# Altium PCB PCB_PowerMonitor.PcbDoc
Units mil, origin at the board's own origin, x right, y up, seen from the top; angles counter-clockwise.
Board outline 1565 x 1440 mil, 2 copper layers (Top Layer, Bottom Layer); 9 components, 9 nets, 32 pads, 1 vias.
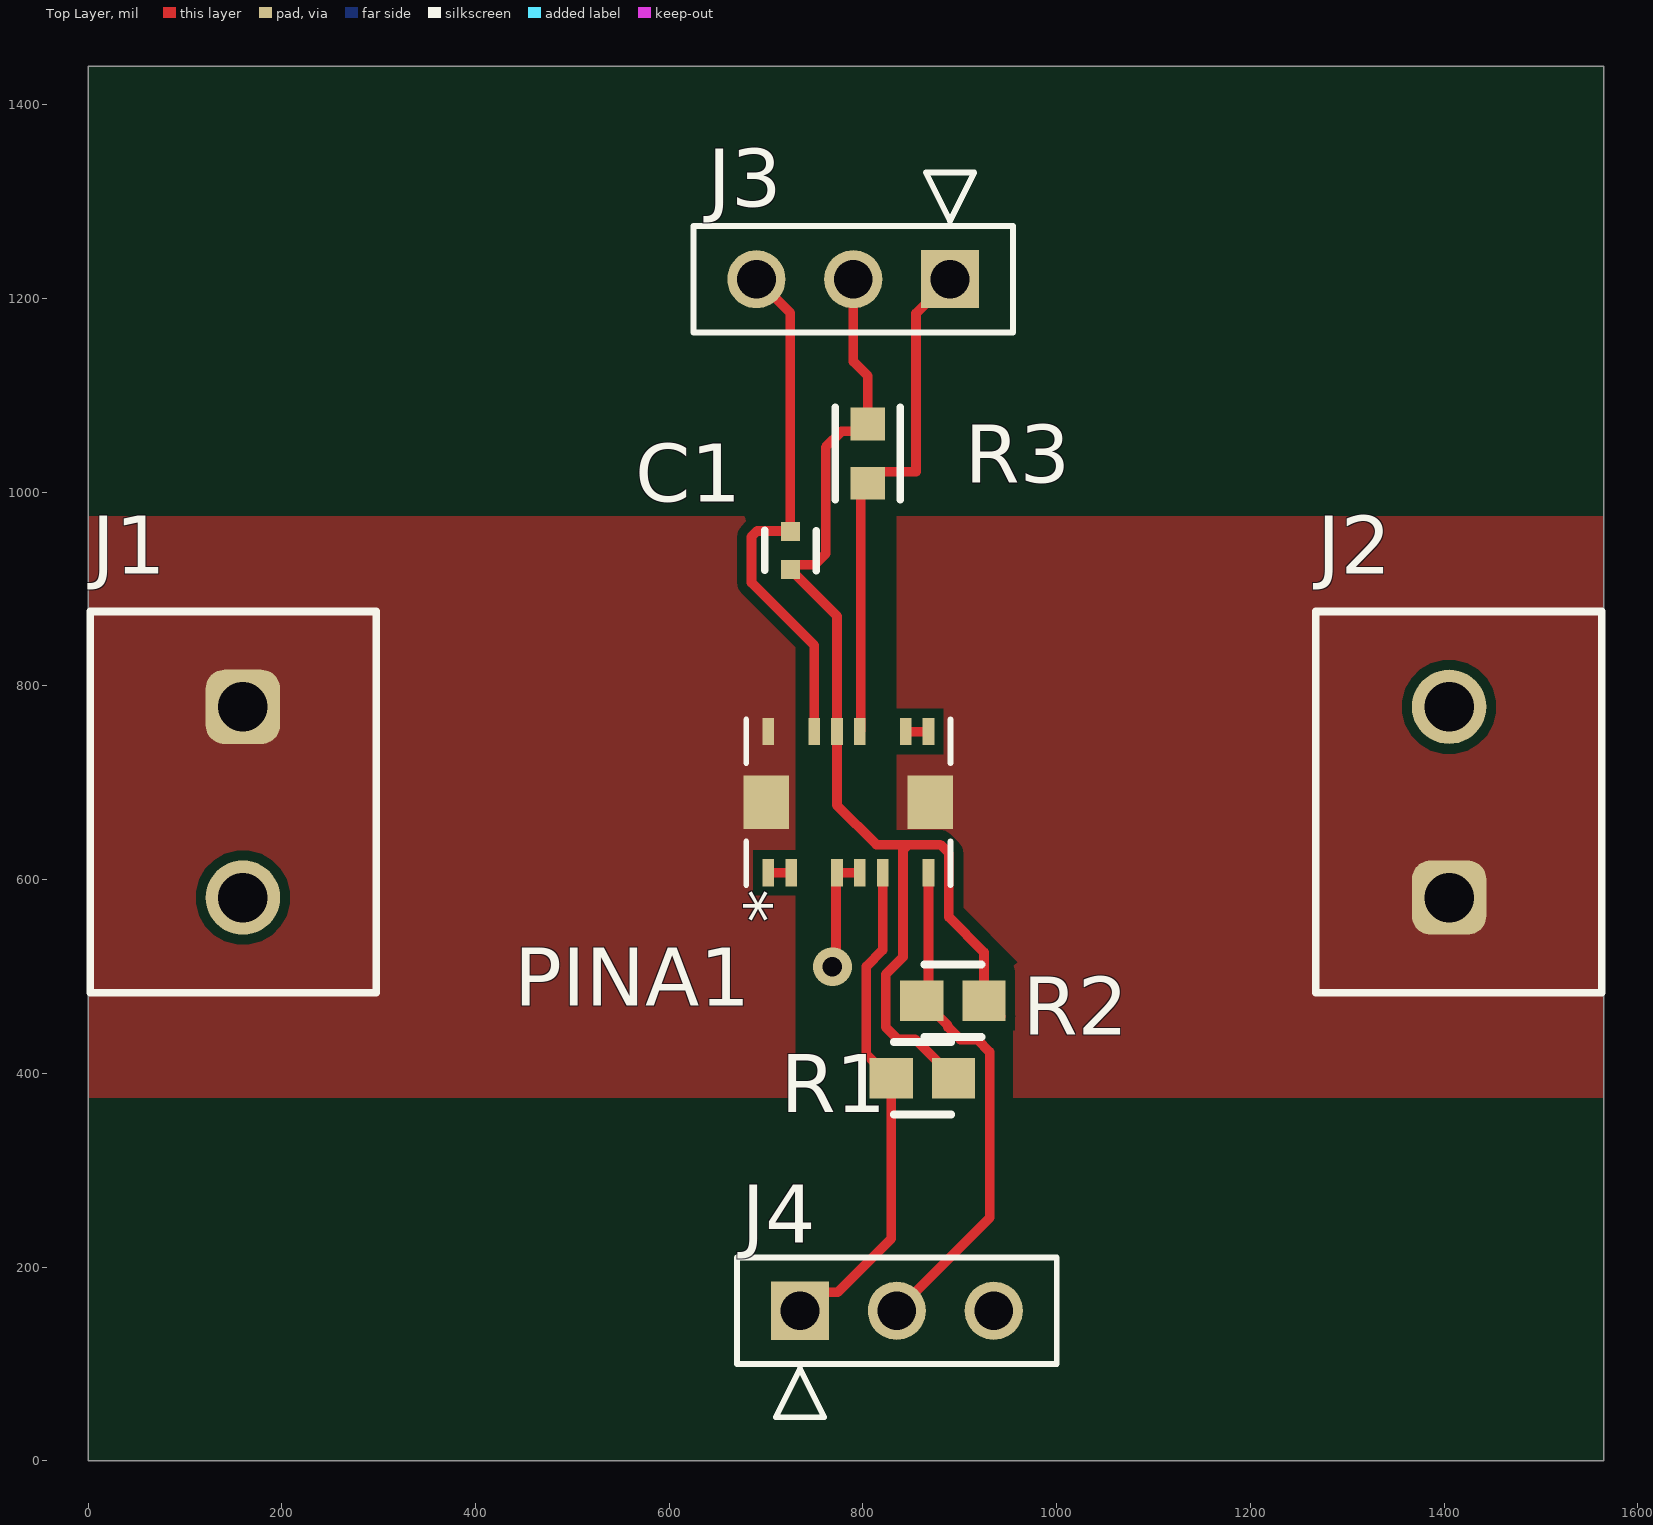
[diagram p0: Top Layer view]
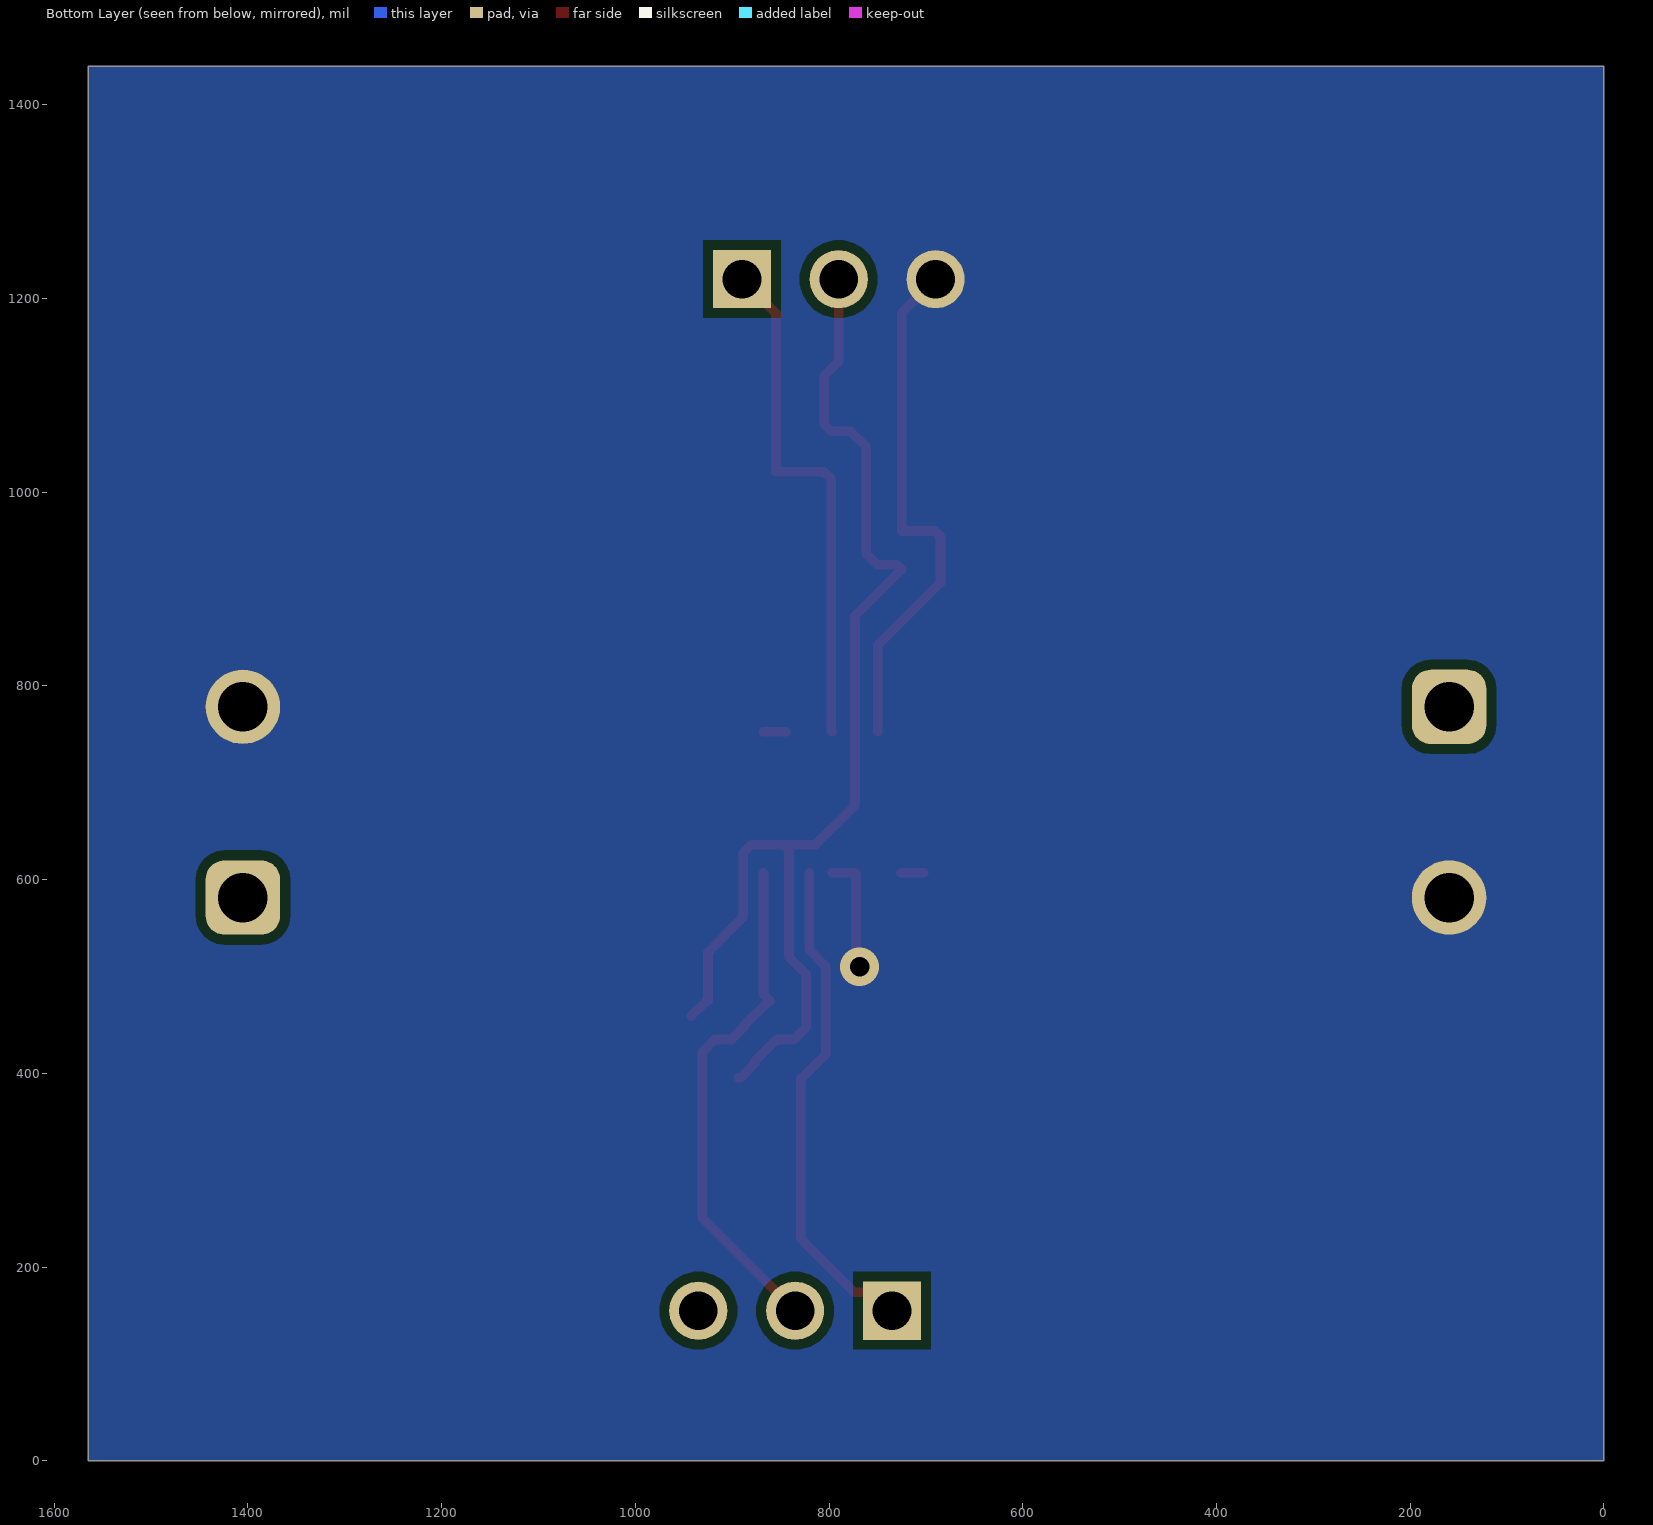
[diagram p1: Bottom Layer view, seen from below]
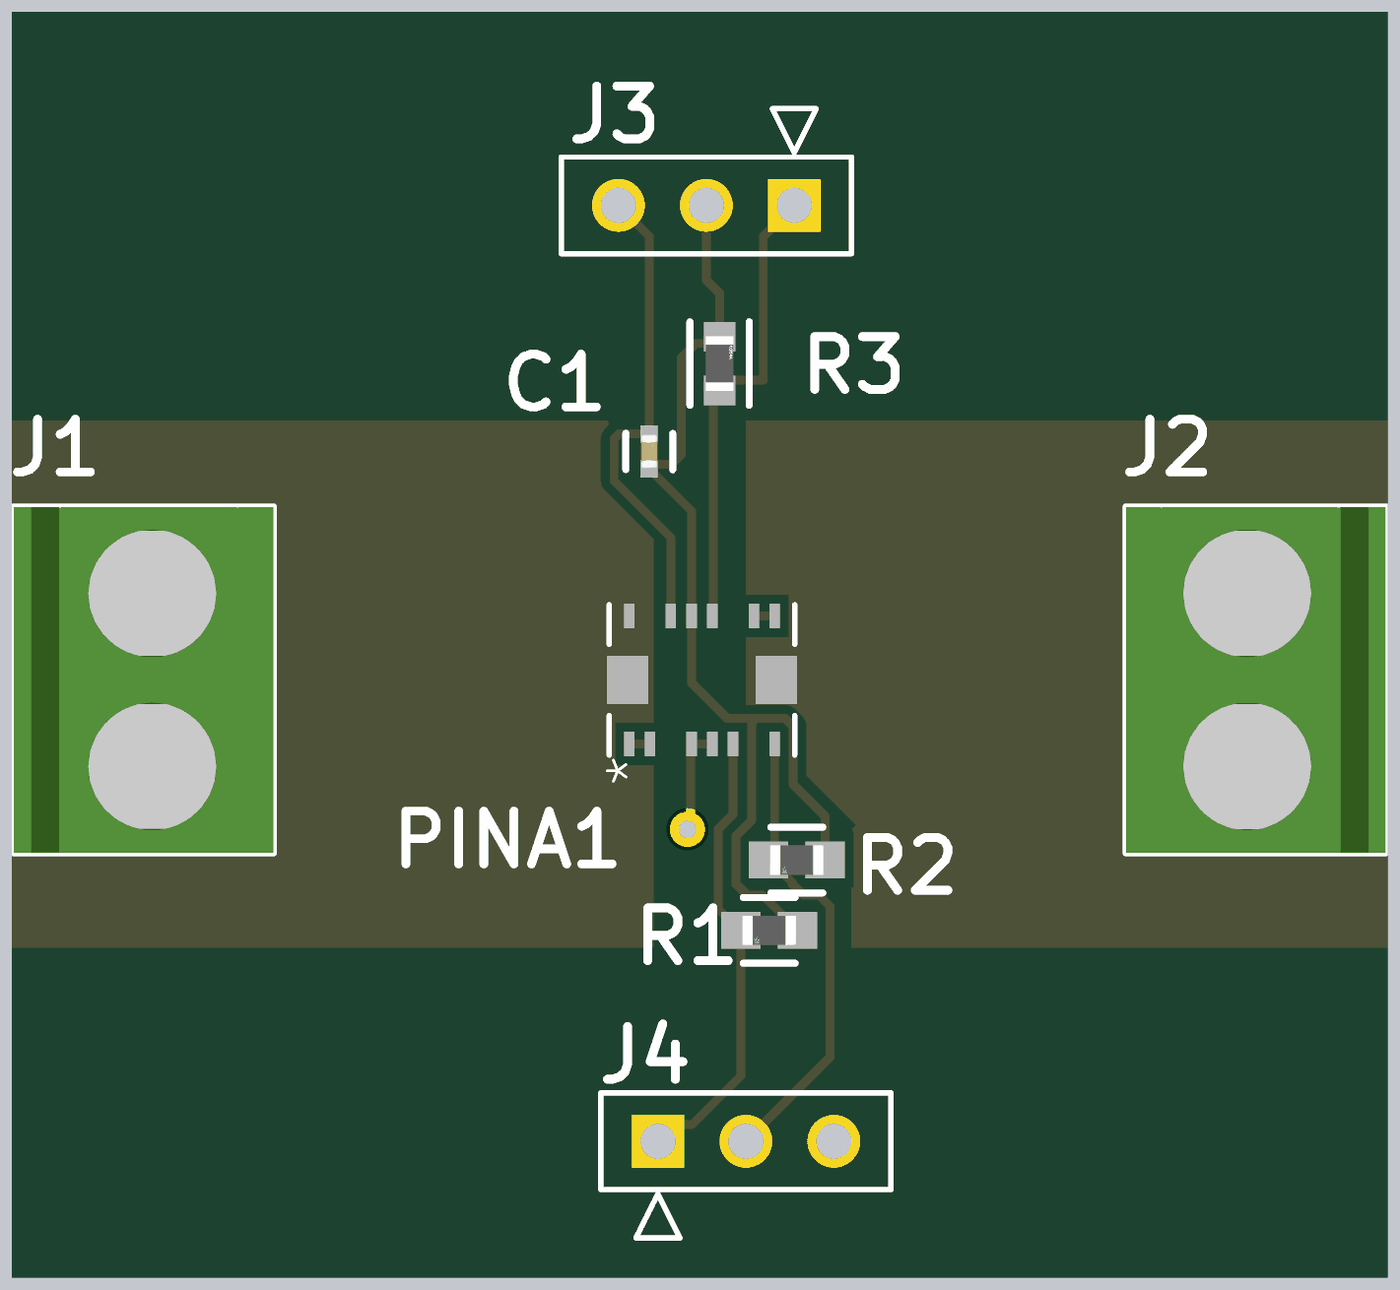
[diagram p2: 3D render of the assembled board from above, using the file's embedded part models]

## Layer stack, top to bottom
Top Solder: solder mask 0.4, Solder Resist, Dk 3.5
Top Layer: signal copper 1.4
Dielectric 1: core 12.6, FR-4, Dk 4.8
Bottom Layer: signal copper 1.4
Bottom Solder: solder mask 0.4, Solder Resist, Dk 3.5

## Board outline
0,0 0,1440 1565,1440 1565,0

## Design rules (kind name [scope] priority, off if disabled: settings)
AssemblyTestPointUsage [All] p1: isadvanced=TRUE
AssemblyTestpoint [All] p1: isadvanced=TRUE testpointundercomponent=TRUE minsize=40 maxsize=100 preferedsize=60 minholesize=0 maxholesize=40 preferedholesize=32 testpointgrid=1 usegrid=TRUE gridtolerance=0.01 allowsidetop=TRUE allowsidebottom=TRUE
Clearance Clearance_4 [(InNetClass('GateDriver')or InNet('GND')) and (Name like U1) vs (InNetClass('GateDriver')or InNet('GND')) and (Name like U1)] p1: isadvanced=TRUE gap=0 ignorepadtopadclearanceinfootprint=TRUE
Clearance Clearance_1 [InComponent('U4') vs InComponent('U4')] p2: isadvanced=TRUE gap=0 ignorepadtopadclearanceinfootprint=TRUE
Clearance Clearance_3 [InComponent('U4')] p3: isadvanced=TRUE gap=10 ignorepadtopadclearanceinfootprint=FALSE except(0: Arc-SMDPad Arc-THPad Arc-Fill Arc-Poly Arc-Region Track-SMDPad Track-THPad Track-Fill Track-Poly Track-Region SMDPad-SMDPad SMDPad-THPad SMDPad-Text THPad-Text Fill-Text Poly-Text Region-Text)
Clearance Clearance_2 [InComponent('U1')] p4: isadvanced=TRUE gap=10 ignorepadtopadclearanceinfootprint=TRUE except(0: Arc-Arc Arc-Track Arc-SMDPad Arc-Text Track-Track Track-SMDPad Track-Text SMDPad-Text Text-Text)
Clearance Clearance_1 [OnMid vs OnMid] p5: gap=10 ignorepadtopadclearanceinfootprint=FALSE sourcerule=46 cellrowname=All cellrowtype=0 cellcolname=All cellcoltype=0 innerlayers=TRUE
Clearance Clearance_2 [(ExistsOnLayer('Top Layer') Or ExistsOnLayer('Bottom Layer')) vs (ExistsOnLayer('Top Layer') Or ExistsOnLayer('Bottom Layer'))] p6: gap=10 ignorepadtopadclearanceinfootprint=FALSE sourcerule=46 cellrowname=All cellrowtype=0 cellcolname=All cellcoltype=0 outerlayers=TRUE
Clearance [All] p7: gap=10 ignorepadtopadclearanceinfootprint=FALSE ismatrix=TRUE
ComponentClearance [All] p1: isadvanced=TRUE gap=10 collisioncheckmode=3 verticalgap=10 showdistances=FALSE
FabricationTestPointUsage [All] p1: isadvanced=TRUE valid=0 allowmultiple=FALSE
FabricationTestpoint [All] p1: isadvanced=TRUE side=3 testpointundercomponent=TRUE minsize=40 maxsize=100 preferedsize=60 minholesize=0 maxholesize=40 preferedholesize=32 testpointgrid=1 allowsidetop=TRUE allowsidebottom=TRUE usegrid=TRUE gridtolerance=0.01
FanoutControl Fanout_BGA [IsBGA] p1: isadvanced=TRUE bgadir=Out bgaviamode=Centered fanoutstyle=Auto fanoutdirection=Alternating viagrid=1 // Fanout_BGA (Default Rule)
FanoutControl Fanout_LCC [IsLCC] p2: isadvanced=TRUE bgadir=Out bgaviamode=Centered fanoutstyle=Auto fanoutdirection=Alternating viagrid=1 // Fanout_LCC (Default Rule)
FanoutControl Fanout_SOIC [IsSOIC] p3: isadvanced=TRUE bgadir=Out bgaviamode=Centered fanoutstyle=Auto fanoutdirection=Alternating viagrid=1 // Fanout_SOIC (Default Rule)
FanoutControl Fanout_Small [(CompPinCount < 5)] p4: isadvanced=TRUE bgadir=Out bgaviamode=Centered fanoutstyle=Auto fanoutdirection=OutThenIn viagrid=1 // Fanout_Small (Default Rule)
FanoutControl Fanout_Default [All] p5: isadvanced=TRUE bgadir=Out bgaviamode=Centered fanoutstyle=Auto fanoutdirection=Alternating viagrid=1 // Fanout_Default (Default Rule)
Height MaxMinHeight_1 [InComponent('L1')] p1: isadvanced=TRUE minheight=0 maxheight=10000 prefheight=5000
Height [All] p2: isadvanced=TRUE minheight=0 maxheight=1000 prefheight=500
HoleSize [All] p1: isadvanced=TRUE absolutevalues=TRUE maxlimit=100 minlimit=1 maxpercent=80.000 minpercent=20.000
HoleToHoleClearance [All] p1: isadvanced=TRUE gap=10 allowstackedmicrovias=TRUE
LayerPairs [All] p1: isadvanced=TRUE enforce=TRUE
MinimumSolderMaskSliver [All] p1: isadvanced=TRUE minsoldermaskwidth=10
NetAntennae [All] p1: isadvanced=TRUE netantennaetolerance=0
PasteMaskExpansion [All] p1: isadvanced=TRUE expansion=0
PlaneClearance [All] p1: isadvanced=TRUE clearance=20
PlaneConnect [All] p1: isadvanced=TRUE planeconnectstyle=Relief reliefexpansion=20 reliefentries=4 reliefconductorwidth=10 reliefairgap=10
PolygonConnect [All] p1: connectstyle=Direct reliefconductorwidth=10 reliefentries=4 polygonreliefangle="90 Angle" airgapwidth=10
RoutingCorners [All] p1: isadvanced=TRUE cornerstyle=45-Degree minsetback=100 maxsetback=100
RoutingPriority [All] p1: isadvanced=TRUE routingpriority=0
RoutingVias [All] p1: holewidth=28 width=50 viastyle="Through Hole" minholewidth=28 minwidth=50 maxholewidth=28 maxwidth=50
ShortCircuit [All] p1: isadvanced=TRUE allowed=FALSE
SilkToSilkClearance [All] p1: isadvanced=TRUE silktosilkclearance=2
SilkToSolderMaskClearance [IsPad] p1: isadvanced=TRUE minsilkscreentomaskgap=2 clearancetoexposedcopper=TRUE
SolderMaskExpansion [All] p1: isadvanced=TRUE expansion=4 istentingtop=FALSE
SupplyNets "Schematic Supply Nets_7" [InNet('GND')] p1: isadvanced=TRUE voltage=0.000
SupplyNets "Schematic Supply Nets_2" [InNet('GND_SIGNAL')] p2: isadvanced=TRUE voltage=0.000
SupplyNets "Schematic Supply Nets_1" [InNet('3.3V')] p3: isadvanced=TRUE voltage=0.000
UnRoutedNet [All] p1: isadvanced=TRUE
UnpouredPolygon [All] p1: isadvanced=TRUE
Width MaxMinWidth_2 [InNet('SW')] p1: isadvanced=TRUE maxlimit=100 minlimit=10 preferedwidth=10 minimp=50.000000 maximp=50.000000 favimp=50.000000
Width MaxMinWidth_1 [All] p2: isadvanced=TRUE maxlimit=50 minlimit=10 preferedwidth=10 minimp=50.000000 maximp=50.000000 favimp=50.000000
Width [All] p3: maxlimit=10 minlimit=10 preferedwidth=10
4 further rules are at their usual default settings.

## Components (designator, comment, footprint, x,y, rotation, side; value= is the part's Value field where it differs from the comment)
C1 "CC0402KRX7R7BB104" FP-CC0402-MFG 725,940 r90 top value="100 nF"
J1 "691137710002" 691137710002 150,680 r270 top
J2 "691137710002" 691137710002 1415,680 r90 top
J3 "PPPC031LFBN-RC" CONN_PPPC031LFBN-RC_SUL 890,1220 r0 top
J4 "PPPC031LFBN-RC" CONN_PPPC031LFBN-RC_SUL 735,155 r180 top
PINA1 "PINA740BIREMR" VQFN14_REM_TEX 785,680 r90 top
R1 "CRCW06034K70FKEA" FP-CRCW0603-e3-IPC_A 861.46,395 r180 top
R2 "CRCW06034K70FKEA" FP-CRCW0603-e3-IPC_A 892.9,475 r180 top
R3 "AC0603FR-071KL" FP-AC0603-IPC_B 805,1040 r90 top

## Footprints (in the part's own frame and the unit in brackets; to place one, negate y for a bottom-side part, rotate by r counter-clockwise, add the part's x,y. Pads: shape width x height; smd on the part's side, far side on the other; paste and mask are expansions set on the pad)
691137710002 [mm] "Horizontal Cable Entry with Pressure Clamp, pitch 5mm, 02p"
  rrect50% 1.95x1.95 hole 1.3: 1(-2.5,0.25)
  round 1.95 hole 1.3: 2(2.5,0.25)
  silkscreen extent -5,-3.75 5,3.75, body extent -5,-3.75 5,3.75, height 11.6
CONN_PPPC031LFBN-RC_SUL [mil]
  rect 60x60 / inner round 60 / far side rect 60x60 hole 40 paste-99999 mask+0: 1(0,0)
  round 60 hole 40 paste-99999 mask+0: 2(-100,0) 3(-200,0)
  silkscreen extent -265,-55 65,110
FP-AC0603-IPC_B [mil]
  rect 33.81x35.91 smd paste+0 mask+0: 1(-30.58,0) 2(30.58,0)
  silkscreen extent -47,-34 47,34, body extent -57,-28 57,28, height 10
FP-CC0402-MFG [mm]
  rect 0.5x0.5 smd paste+0 mask+0: 1(-0.5,0) 2(0.5,0)
  silkscreen extent -0.53,-0.68 0.53,0.67, body extent -0.87,-0.48 0.87,0.48, height 0.25
FP-CRCW0603-e3-IPC_A [mil]
  rect 44.69x41.82 smd paste+0 mask+0: 1(-32.1,0) 2(32.1,0)
  silkscreen extent -30,-37 30,37, body extent -74,-41 74,41, height 10
VQFN14_REM_TEX [mil]
  rect 28x12 smd paste+0 mask+0: 1(-72.83,82.68) 2(-72.83,59.06) 3(-72.83,11.81) 4(-72.83,-11.81) 5(-72.83,-35.43) 6(-72.83,-82.68) 8(72.83,-82.68) 9(72.83,-59.06) 10(72.83,-11.81) 11(72.83,11.81) 12(72.83,35.43) 13(72.83,82.68)
  rect 55x47 smd paste+0 mask+0: 7(0,-84.65) 14(0,84.65)
  silkscreen extent -86,-106 86,106

## Part data
C1: library part CMP-03422-000048-1, "CAP CER 0.1UF 16V X7R 0402", Capacitance="100 nF", Manufacturer=YAGEO, Package=CC0402, Temperature="-55°C to +125°C", Temperature Characteristic=X7R, Temperature Coefficient=30ppm/°C, Temperature Range High=+125°C, Temperature Range Low=-55°C, Tolerance=0.1, Voltage Rating="16 V", Automotive=No, Automotive Grade=NA, Category=Cap, ComponentLink2Description=Datasheet, ComponentLink2URL=http://www.yageo.com/documents/recent/UPY-GP_NP0_16V-to-50V_16.pdf, Device Class L1="Passive Components", Device Class L2=Capacitors, Device Class L3="Ceramic Capacitors", Digikey Description="CAP CER 0.1UF 16V X7R 0402", Footprint Url=http://www.yageo.com/exep/pages/download/literatures/UPY-C_GEN_24.pdf, Height=0.55mm, Ipc Land Pattern Name=CAPC10050X50, Lead Free=Yes, Manufacturer Part Number=CC0402KRX7R7BB104, Material=Ceramic, Mouser Description="0402 0.1 uF 16 V ±10 % Tolerance X7R SMT Multilayer Ceramic Capacitor", Octopart=https://octopart.com/cc0402krx7r7bb104-yageo-42244624, RoHS=TRUE
J1 J2: library part CMP-1502-03324-2, Current Rating=16A, Max Operating Temperature=120°C, Min Operating Temperature=-30°C, Voltage Rating=300V, Contact Material="Nickel, Tin", Height=11.6mm, Lead Pitch=5mm, NexarPartId=78871135, Number of Contacts=2, Number of Pins=2, Number of Rows=1, Packaging=Box, RoHS=Non-Compliant
J3 J4: "No Description Available", Mfr_Name=Sullins, RefDes=RefDes, Type=Type
PINA1: "No Description Available", Mfr_Name="Texas Instruments", RefDes=RefDes, Type=Linear
R1 R2: library part CMP-1666-00019-3, "RES Thick Film, 4.7kΩ, 1%, 0.1W, 100ppm/°C, 0603", Case Code (Imperial)=0603, Case Code (Metric)=1608, Max Operating Temperature=155°C, Min Operating Temperature=-55°C, Package Quantity=5000, Power Rating=100mW, Resistance=4.7kR, Temperature Coefficient=100ppm/°C, Tolerance=1%, Voltage Rating=75V, Case/Package=0603, Composition="Thick Film", Contact Plating=Tin, Depth=0.85mm, Height=0.45mm, Lead Free="Lead Free", Length=1.55mm, Military Standard=Not, Mount="Surface Mount", Packaging="Tape and Reel", Termination=SMD/SMT, Voltage Rating (DC)=75V, Weight=7.1E-05oz, Width=0.85mm
R3: library part CMP-2000-04828-3, "RES 1kΩ 1.00% 0.1W 0603", Case Code (Imperial)=0603, Case Code (Metric)=1608, Max Operating Temperature=155°C, Max Power Dissipation=100mW, Min Operating Temperature=-55°C, Package Quantity=1, Ratings=AEC-Q200, Resistance=1kR, Resistor Type="Thick Film", Temperature Coefficient=100ppm/°C, Tolerance=1%, Voltage Rating=50V, Case/Package=0603, Construction=Rectangular, Depth=0.8mm, Features="Moisture Resistant", Height=0.022inch, Lead Free="Lead Free", Length=0.063inch, Military Standard=Not, Number of Terminations=2, Packaging="Tape and Reel", Power Rating=100mW, RoHS Compliant=Yes, Series=AC, Size Code=0603, Termination=SMD/SMT, Width=0.031inch

## Via types
v1: diameter 40, hole 20, Top Layer to Bottom Layer, 1 vias

## Nets (pads, with @x,y where several pads share a name; then routed paths per layer and width w, separated by ;. In a path a pad name is that pad's centre, name@x,y a point inside that pad or via, vN(x,y) a via of type N, cw(c..) or ccw(c..) an arc to the next point about the centre after c; other vN are vias at no path point)
3.3V: C1.1 J3.2 PINA1.11 R1.1 R2.1 R3.2 | length 1244
  Top Layer w10: J3.2 790,1135 805,1120 R3.2 797.32,1062.9 777.9,1062.9 761.49,1046.49 761.49,936.49 750.16,925.16 729.84,925.16 C1.1 773.19,872.13 PINA1.11 773.19,676.81 813.83,636.17 846.86,636.17 ; R1.1@893.56,395.47 891.66,395.47 876.22,410.91 876.22,412.81 854.03,435 836.33,435 823.45,447.88 823.45,502.12 841.43,520.1 841.43,630.74 846.86,636.17 ; R2.1@942.34,459.09 926.44,475 R2.1 925,525 888.68,561.32 888.68,627.38 879.89,636.17 846.86,636.17
GND: C1.2 J1.2 J2.2 J3.3 PINA1.3 PINA1.4 PINA1.12 | length 667.5
  Top Layer w10: J3.3 725,1185 725,960.32 724.69,960 690.86,960 685,954.14 685,906.68 749.57,842.11 PINA1.12 ; v1(768.45,510) 772.19,513.74 772.19,606.17 PINA1.3 PINA1.4
NetJ1_1: J1.1 PINA1.13 PINA1.14
NetJ2_1: J2.1 PINA1.7
NetJ3_1: J3.1 PINA1.10 R3.1 | length 534.9
  Top Layer w10: PINA1.10 797.81,753.83 797.81,1013.97 805,1021.16 854.81,1021.16 854.81,1184.81 J3.1
NetJ4_1: J4.1 PINA1.5 R1.2 | length 521.6
  Top Layer w10: J4.1 754.14,174.14 774.14,174.14 829.36,229.36 R1.2 827.93,395 803.45,419.47 803.45,510.41 820.43,527.39 PINA1.5
NetJ4_2: J4.2 PINA1.6 R2.2 | length 534.9
  Top Layer w10: J4.2 930.91,250.91 930.91,422.12 918.03,435 900.54,435 887.66,447.88 887.66,449.57 862.23,475 R2.2 867.68,481.88 PINA1.6
NetPINA1_1: PINA1.1 PINA1.2 | length 23.6
  Top Layer w10: PINA1.1 PINA1.2
NetPINA1_8: PINA1.8 PINA1.9 | length 23.6
  Top Layer w10: PINA1.9 PINA1.8
pads on no net: J4.3

## Polygon pours and split planes (outlines as drawn)
NetJ2_1 on Top Layer "NETJ2_1_L01_P023" (solid, pour order 23): 835,600 840,595 900,595 900,575 960,515 955,510 955,375 1565,375 1565,975 835,975
NetJ1_1 on Top Layer "NETJ1_1_L01_P003" (solid, pour order 3): 0,975 730,975 730,375 0,375
GND on Bottom Layer "GND_L02_P024" (solid, pour order 24): 0,0 0,1440 1565,1440 1565,0

## Text inside footprints (layer, text, board x,y; h text height)
PINA1: Top Overlay "*" at 727.32,555.67 h50 r90; Top 3D Body "*" at 727.32,633.67 h50 r90